# Altium PCB PCB1.PcbDoc
Units mil, origin at the board's own origin, x right, y up, seen from the top; angles counter-clockwise.
Board outline 3750 x 2230 mil, 2 copper layers (Top Layer, Bottom Layer); 13 components, 15 nets, 39 pads, 4 vias.
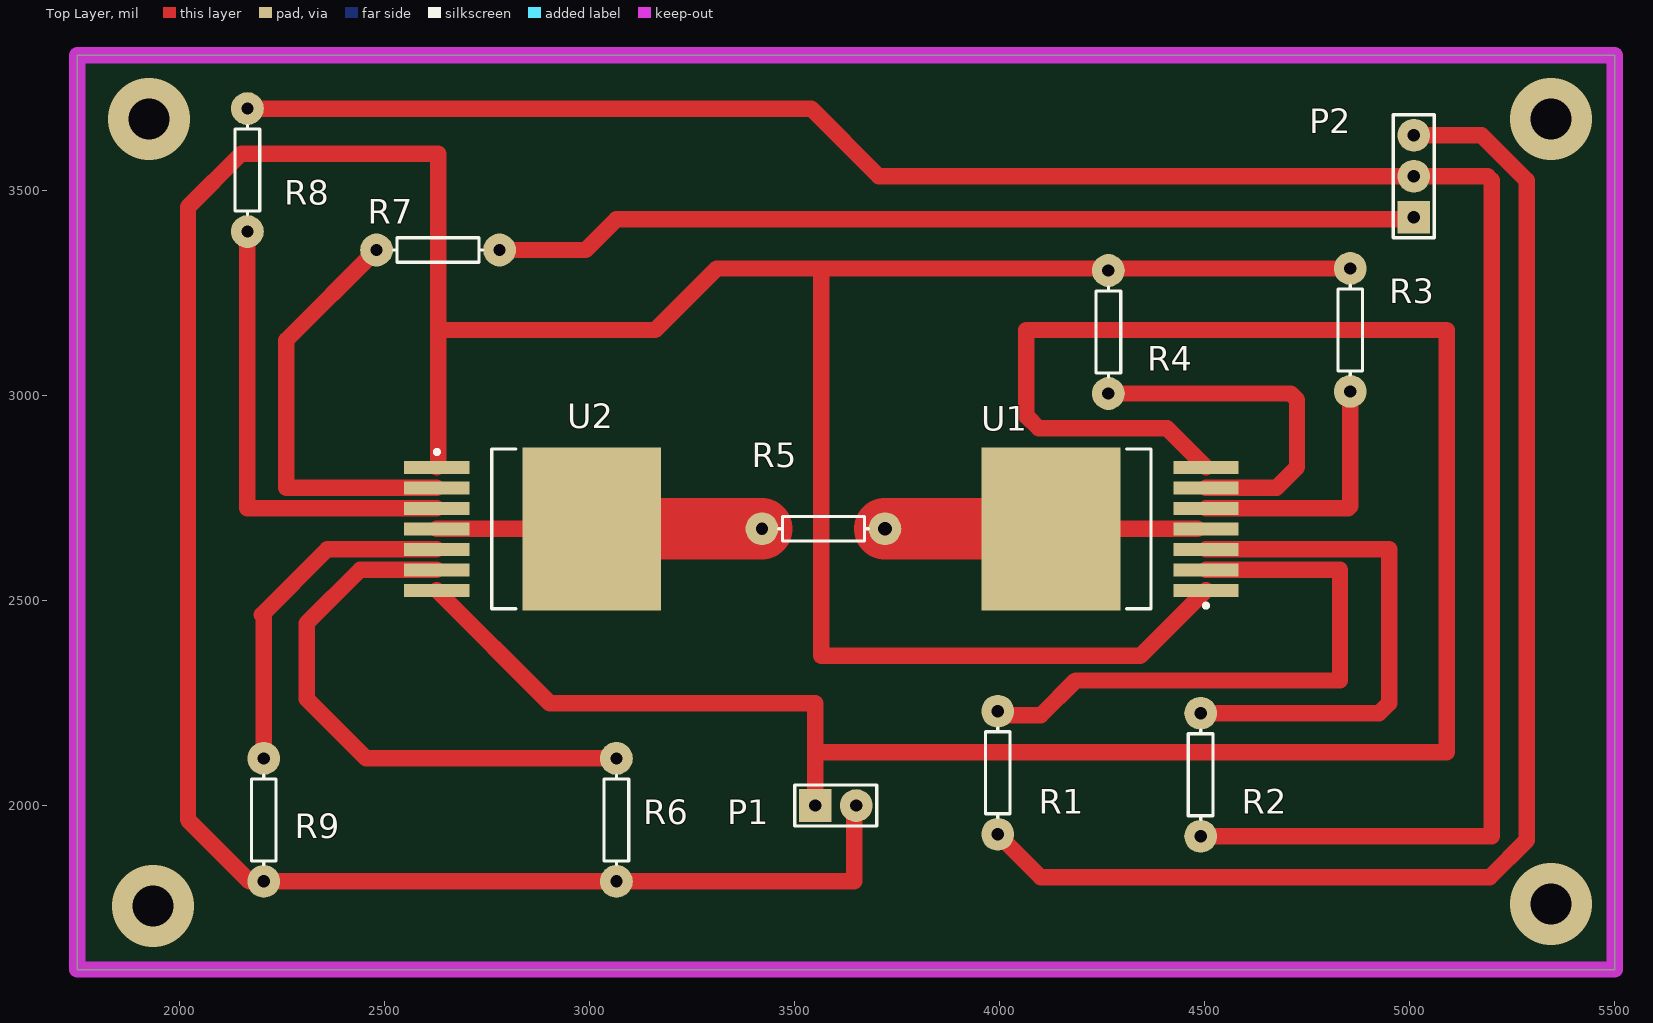
[diagram p0: Top Layer view]
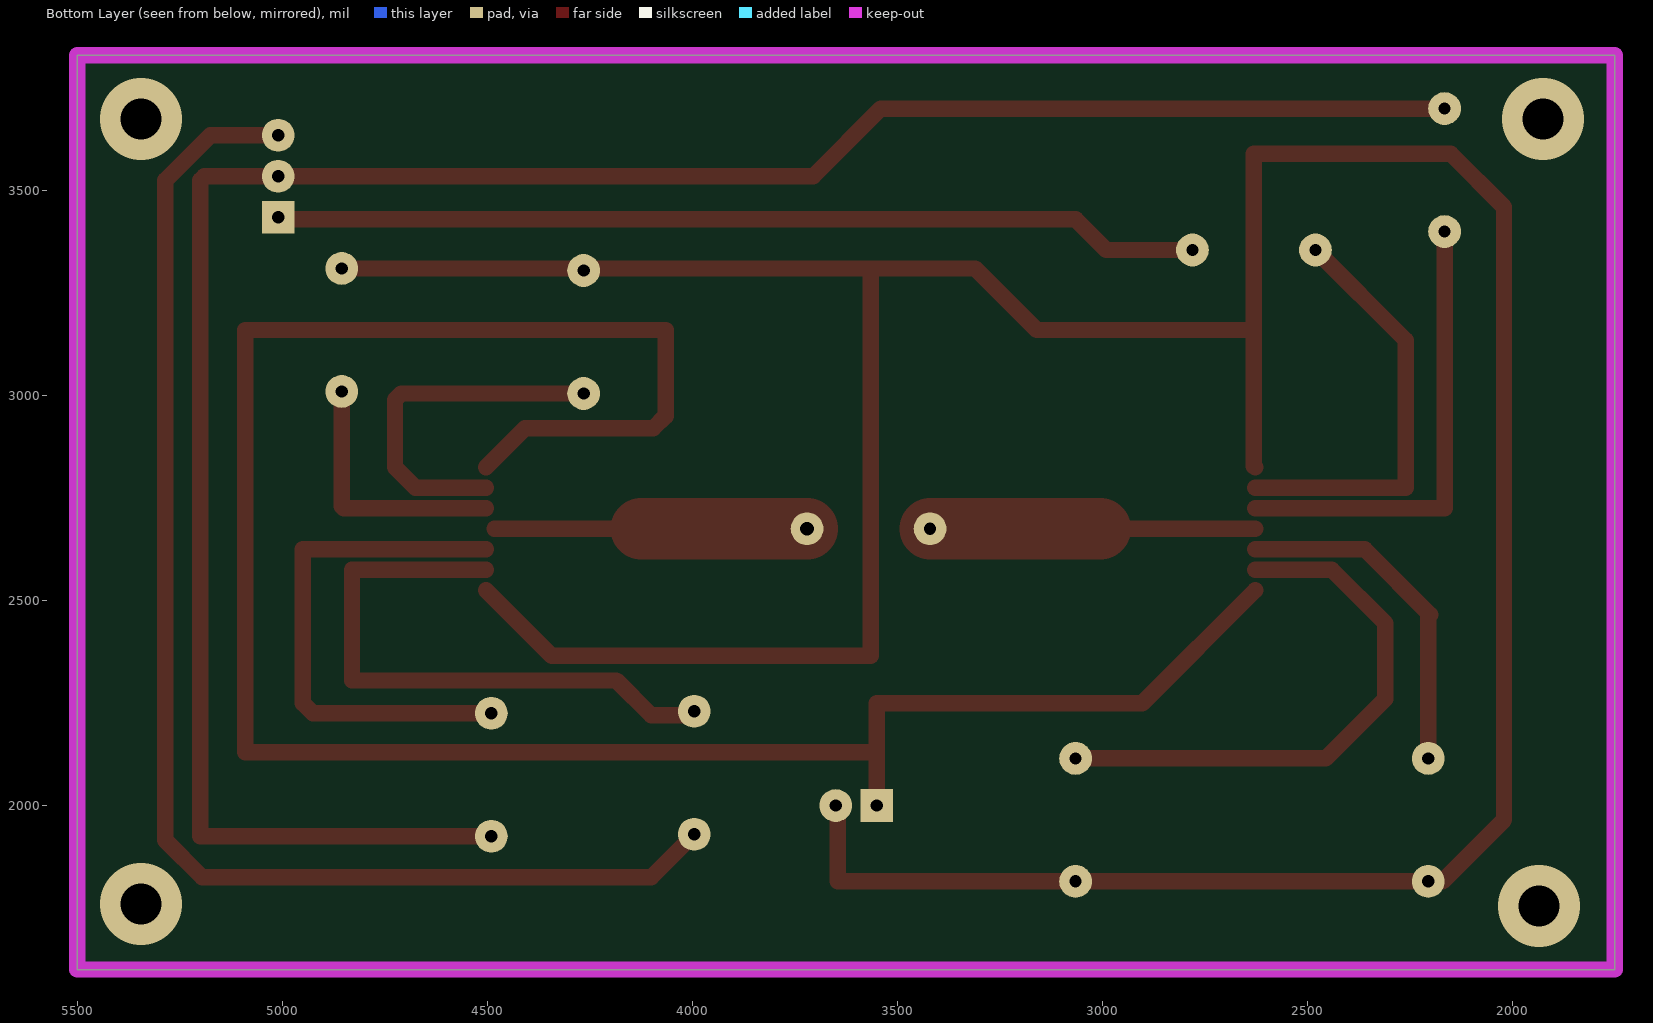
[diagram p1: Bottom Layer view, seen from below]

## Layer stack, top to bottom
Top Solder: solder mask 0.4, Solder Resist, Dk 3.5
Top Layer: signal copper 1.4
Dielectric 1: dielectric 12.6, FR-4, Dk 4.8
Bottom Layer: signal copper 1.4
Bottom Solder: solder mask 0.4, Solder Resist, Dk 3.5

## Board outline
1750,1600 1750,3830 5500,3830 5500,1600

## Design rules (kind name [scope] priority, off if disabled: settings)
Clearance [All] p1: gap=10
PolygonConnect [All] p1: connectstyle=Relief reliefconductorwidth=10 reliefentries=4 polygonreliefangle="90 Angle" airgapwidth=10
RoutingVias [All] p1: holewidth=28 width=50 viastyle="Through Hole" minholewidth=28 minwidth=50 maxholewidth=28 maxwidth=50
SolderMaskExpansion [All] p1: expansion=4
Width [All] p1: maxlimit=40 minlimit=40 preferedwidth=40
30 further rules are at their usual default settings.

## Components (designator, comment, footprint, x,y, rotation, side; value= is the part's Value field where it differs from the comment)
P1 "Header 2" HDR1X2 3550,2000 r0 top
P2 "Header 3" HDR1X3 5010,3435 r90 top
R1 "Res1" AXIAL-0.3#1 3995,2080 r90 top
R2 "Res1" AXIAL-0.3#1 4490,2075 r90 top
R3 "Res1" AXIAL-0.3#1 4855,3160 r270 top
R4 "Res1" AXIAL-0.3#1 4265,3155 r270 top
R5 "Res1" AXIAL-0.3#2 3570,2675 r0 top
R6 "Res1" AXIAL-0.3#1 3065,1965 r90 top
R7 "Res1" AXIAL-0.3#1 2630,3355 r180 top
R8 "Res1" AXIAL-0.3#1 2165,3550 r270 top
R9 "Res1" AXIAL-0.3#1 2205,1965 r90 top
U1 "BTS7960B" INF-P-TO-263-7-6_N 4268.7,2675 r180 top
U2 "BTS7960B" INF-P-TO-263-7-6_N 2861.3,2675 r0 top

## Footprints (in the part's own frame and the unit in brackets; to place one, negate y for a bottom-side part, rotate by r counter-clockwise, add the part's x,y. Pads: shape width x height; smd on the part's side, far side on the other; paste and mask are expansions set on the pad)
AXIAL-0.3#1 [mil] "Axial Device, Thru-Hole; 2 Leads; 0.3 in Pin Spacing"
  round 80 hole 30: 1(-150,0) 2(150,0)
  silkscreen extent -109,-30 109,30
AXIAL-0.3#2 [mil] "Axial Device, Thru-Hole; 2 Leads; 0.3 in Pin Spacing"
  round 80 hole 30: 1(-150,0)
  round 80 hole 33.46: 2(150,0)
  silkscreen extent -109,-30 109,30
HDR1X2 [mil] "Connector; Header; 2 Position"
  rect 80x80 hole 30: 1(0,0)
  round 80 hole 30: 2(100,0)
  silkscreen extent -50,-50 150,50
HDR1X3 [mil] "Connector; Header; 3 Position"
  rect 80x80 hole 30: 1(0,0)
  round 80 hole 30: 2(100,0) 3(200,0)
  silkscreen extent -50,-50 250,50
INF-P-TO-263-7-6_N [mm] "DPAK, 7-Leads, Body 9.9x9.2mm, Pitch 1.27mm, IPC Medium Density"
  rect 4.05x0.8 smd: 1(-5.95,3.81) 2(-5.95,2.54) 3(-5.95,1.27) 4(-5.95,0) 5(-5.95,-1.27) 6(-5.95,-2.54) 7(-5.95,-3.81)
  rect 8.6x10.1 smd: 8(3.65,0)
  silkscreen extent -6.07,-4.95 -1.05,4.95, body extent -2.55,-4.95 6.85,4.95, height 4.5

## Part data
P1: "Header, 2-Pin"
P2: "Header, 3-Pin"
R1 R2 R3 R4 R5 R6 R7 R8 R9: "Resistor"
U1 U2: "High Current PN Half Bridge NovalithIC, -40 to 150 degC, P-TO-263-7-6"

## Via types
v1: diameter 200, hole 100, Top Layer to Bottom Layer, 4 vias

## Nets (pads, with @x,y where several pads share a name; then routed paths per layer and width w, separated by ;. In a path a pad name is that pad's centre, name@x,y a point inside that pad or via, vN(x,y) a via of type N, cw(c..) or ccw(c..) an arc to the next point about the centre after c; other vN are vias at no path point)
GND: P1.2 R3.1 R4.1 R6.1 R9.1 U1.1 U2.1 | length 9044.8
  Top Layer w40: U2.1 2630,2827.95 2630,3170 ; P1.2@3650,1995 P1.2 3645,1995 3645,1815 R6.1 R9.1 2170,1815 2020,1965 2020,3460 2150,3590 2630,3590 2630,3170 ; U1.1 4342.95,2365 3565,2365 3565,3310 ; R3.1 3565,3310 ; 2630,3170 2640,3160 3160,3160 3310,3310 3565,3310
NetP2_1: P2.1 R7.1 | length 2263.1
  Top Layer w40: R7.1 2990,3355 3065,3430 5005,3430 P2.1
NetP2_2: P2.2 R2.1 R8.1 | length 5417.5
  Top Layer w40: R8.1 3540,3700 3705,3535 P2.2 5190,3535 5200,3525 5200,1925 R2.1
NetP2_3: P2.3 R1.1 | length 3301.3
  Top Layer w40: R1.1 4100,1825 5195,1825 5285,1915 5285,3525 5175,3635 P2.3
NetR1_2: R1.2 U1.2 | length 1471.4
  Top Layer w40: R1.2 4005,2220 4100,2220 4185,2305 4830,2305 4830,2575 U1.2
NetR2_2: R2.2 U1.3 | length 1292.4
  Top Layer w40: R2.2 4925,2225 4950,2250 4950,2625 U1.3
NetR3_2: R3.2 U1.5 | length 634.1
  Top Layer w40: U1.5 4850,2725 4855,2730 R3.2
NetR4_2: R4.2 U1.6 | length 874
  Top Layer w40: R4.2 4710,3005 4725,2990 4725,2825 4675,2775 U1.6
NetR5_1: R5.1 U2.4 U2.8 | length 793
  Top Layer w40: U2.4 U2.8
  Top Layer w150: U2.8 R5.1
NetR5_2: R5.2 U1.4 U1.8 | length 762.2
  Top Layer w40: U1.8 U1.4@4482.24,2675
  Top Layer w150: R5.2 U1.8
NetR6_2: R6.2 U2.6 | length 1371
  Top Layer w40: U2.6 2440,2575 2310,2445 2310,2260 2455,2115 R6.2
NetR7_2: R7.2 U2.2 | length 1038.2
  Top Layer w40: R7.2 2260,3135 2260,2775 U2.2
NetR8_2: R8.2 U2.3 | length 1137
  Top Layer w40: R8.2 2165,2725 U2.3
NetR9_2: R9.2 U2.5 | length 845.4
  Top Layer w40: R9.2 2205,2460 2200,2465 2360,2625 U2.5
VCC: P1.1 U1.7 U2.7 | length 5585.7
  Top Layer w40: U2.7 2902.05,2250 3550,2250 3550,2140 ; P1.1 3550,2140 ; U1.7 4407.95,2920 4095,2920 4065,2950 4065,3160 5090,3160 5090,2130 3560,2130 3550,2140
copper on no net:
  other v1: 1935,1755 5345,1760 1925,3675 5345,3675

## Keep-outs
Keep-Out Layer:
  the board outline again, w40